# Altium PCB 175-00060, rev1, PCB, NRES RTD_TEC Board.PcbDoc (part 3 of 3)
Units mm, origin at the board's own origin, x right, y up, seen from the top; angles counter-clockwise.
Board outline 188.3 x 85 mm, 7 copper layers (Top Layer (*.GTL), MidLayer1 (*.G1), InternalPlane1 (*.GP1), InternalPlane2 (*.GP2), InternalPlane3 (*.GP3), InternalPlane4 (*.GP4), Bottom Layer (*.GBL)); 241 components, 178 nets, 958 pads, 584 vias.
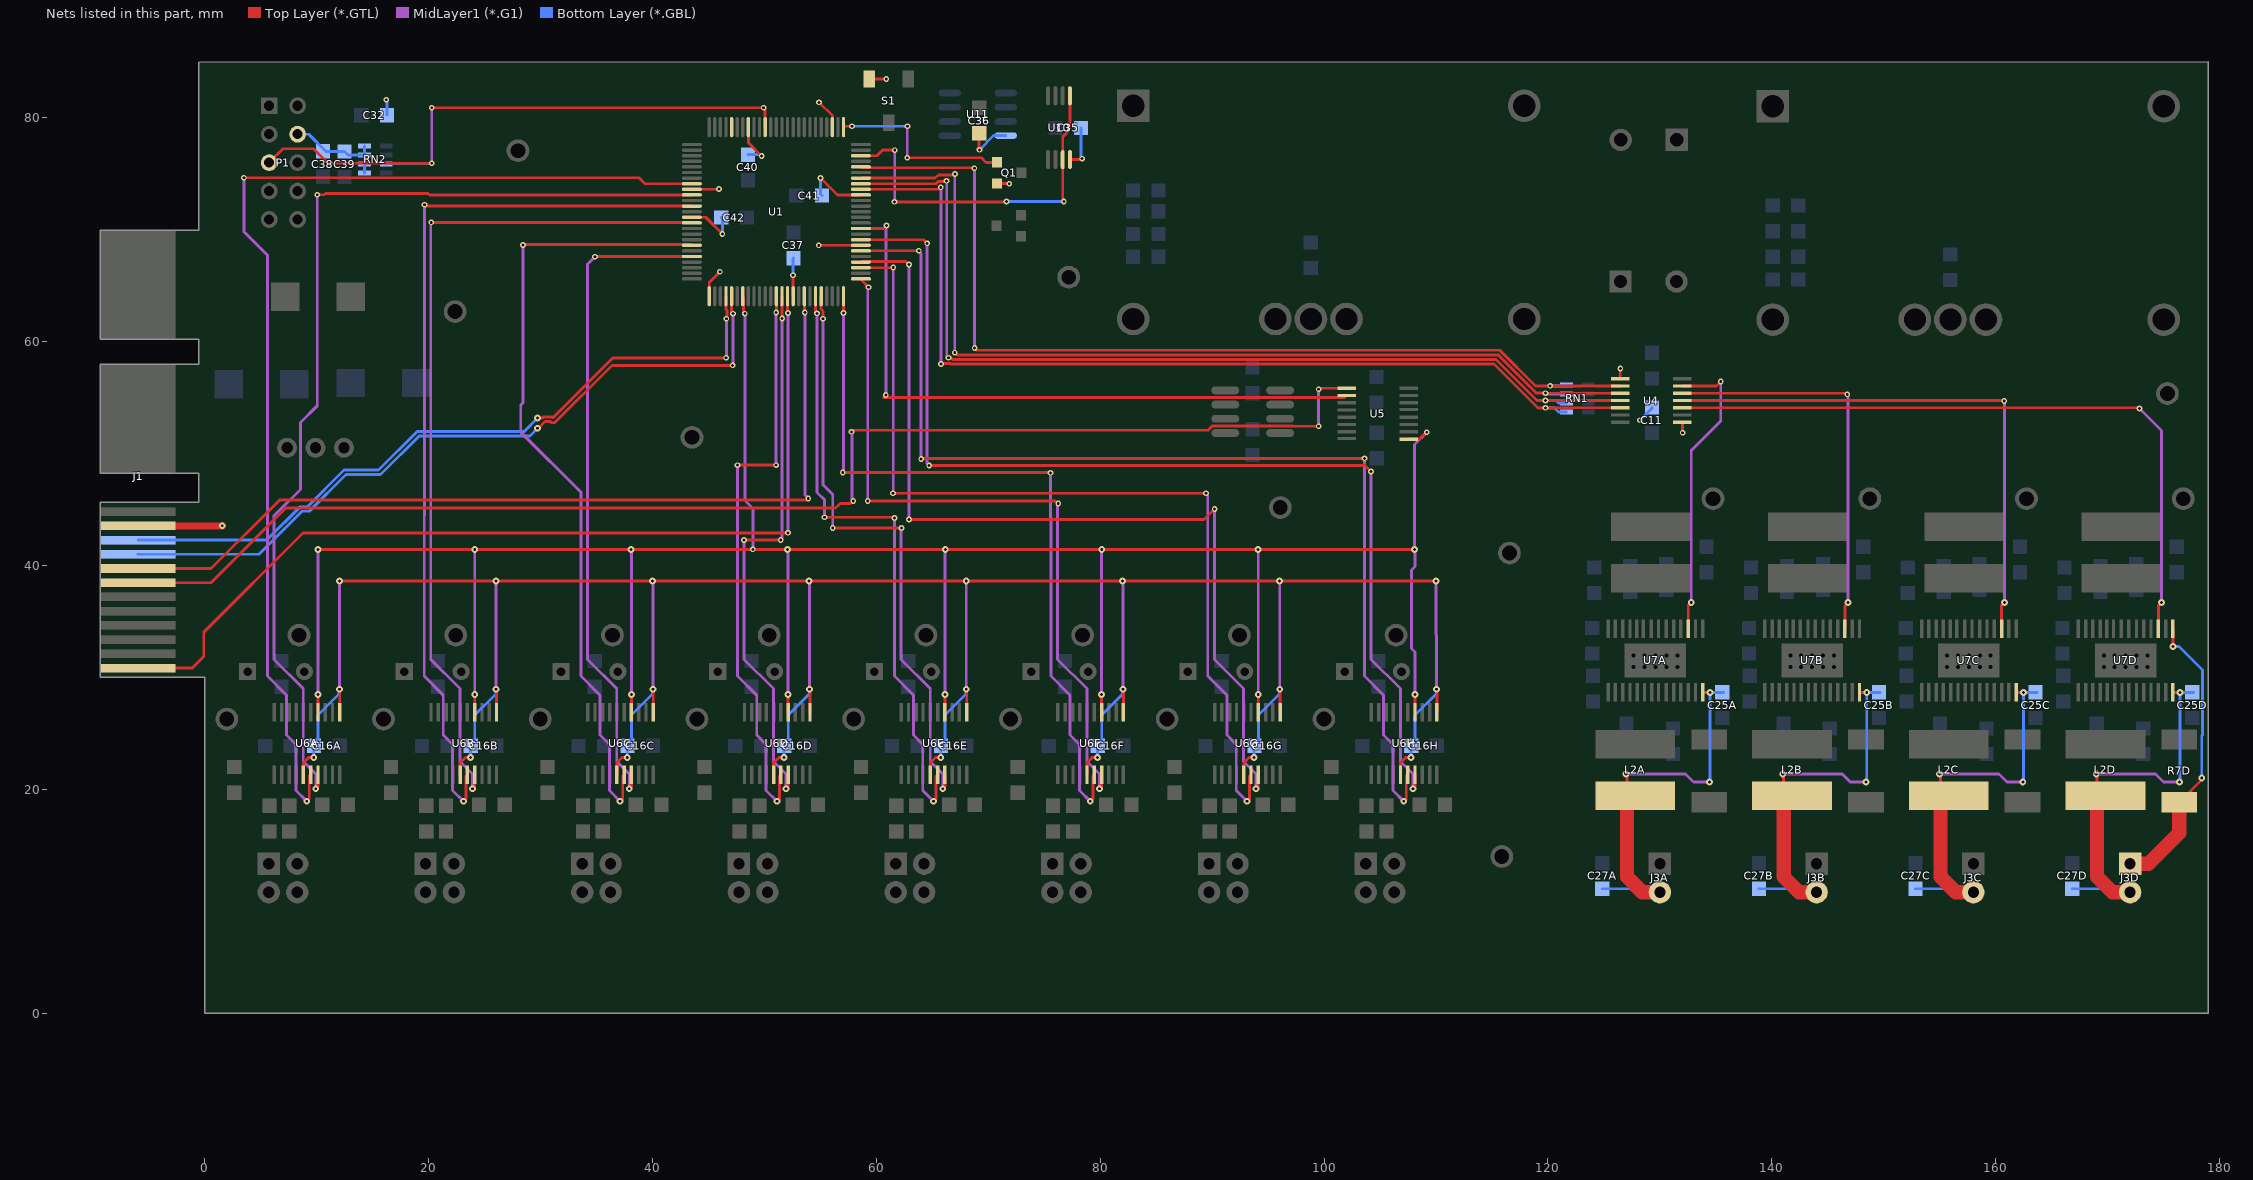
[diagram p8: the nets of this part, all layers, seen from the top]

## Via types
v1: diameter 0.61, hole 0.254, Top Layer (*.GTL) to Bottom Layer (*.GBL), tented both sides, 359 vias
v2: diameter 0.508, hole 0.254, Top Layer (*.GTL) to Bottom Layer (*.GBL), tented both sides, 105 vias
v3: diameter 0.508, hole 0.254, Top Layer (*.GTL) to Bottom Layer (*.GBL), 103 vias
v4: diameter 1.27, hole 0.711, Top Layer (*.GTL) to Bottom Layer (*.GBL), 17 vias

## Nets (pads, with @x,y where several pads share a name; then routed paths per layer and width w, separated by ;. In a path a pad name is that pad's centre, name@x,y a point inside that pad or via, vN(x,y) a via of type N, cw(c..) or ccw(c..) an arc to the next point about the centre after c; other vN are vias at no path point) (continued)
TEC_DRIVE(+)D: J3D.1 R7D.1 U7D.15 | length 26.3
  Top Layer (*.GTL) w0.254: U7D.15@175.825,34.348 175.825,32.756 v1(175.835,32.746) ; R7D.1@176.4,18.84 178.553,20.993 178.536,21.011 v1(178.401,21.011)
  Top Layer (*.GTL) w1.27: J3D.1@172,13.34 173.651,13.34 176.4,16.089 R7D.1@176.4,18.84
  Bottom Layer (*.GBL) w0.254: v1(175.835,32.746) 176.369,32.746 178.477,30.637 178.477,24.821 178.401,24.745 v1(178.401,21.011)
TEC_DRIVE(-)A: C25A.1 C27A.2 J3A.2 L2A.2 U7A.14 | length 36.7
  Top Layer (*.GTL) w0.254: v1(126.977,21.366) 127.054,21.29 L2A.2@127.054,18.682 ; U7A.14@133.825,28.648 134.453,28.648 v1(134.47,28.631)
  Top Layer (*.GTL) w1.27: L2A.2@127.8,19.429 127.054,18.682 127.054,12.172 128.425,10.8 J3A.2@130,10.8
  MidLayer1 (*.G1) w0.254: v1(126.977,21.366) 132.286,21.366 132.997,20.655 v1(134.42,20.655)
  Bottom Layer (*.GBL) w0.254: C27A.2@124.844,11.105 129.695,11.105 J3A.2@130,10.8 ; v1(134.42,20.655) 134.47,20.706 v1(134.47,28.631) 135.664,28.631 C25A.1@135.69,28.656
TEC_DRIVE(-)B: C25B.1 C27B.2 J3B.2 L2B.2 U7B.14 | length 36.7
  Top Layer (*.GTL) w0.254: v1(140.977,21.366) 141.054,21.29 L2B.2@141.054,18.682 ; U7B.14@147.825,28.648 148.453,28.648 v1(148.47,28.631)
  Top Layer (*.GTL) w1.27: L2B.2@141.8,19.429 141.054,18.682 141.054,12.172 142.425,10.8 J3B.2@144,10.8
  MidLayer1 (*.G1) w0.254: v1(140.977,21.366) 146.286,21.366 146.997,20.655 v1(148.42,20.655)
  Bottom Layer (*.GBL) w0.254: C27B.2@138.844,11.105 143.695,11.105 J3B.2@144,10.8 ; v1(148.42,20.655) 148.47,20.706 v1(148.47,28.631) C25B.1@149.664,28.631
TEC_DRIVE(-)C: C25C.1 C27C.2 J3C.2 L2C.2 U7C.14 | length 36.7
  Top Layer (*.GTL) w0.254: v1(154.977,21.366) 155.054,21.29 L2C.2@155.054,18.682 ; U7C.14@161.825,28.648 162.453,28.648 v1(162.47,28.631)
  Top Layer (*.GTL) w1.27: L2C.2@155.8,19.429 155.054,18.682 155.054,12.172 156.425,10.8 J3C.2@158,10.8
  MidLayer1 (*.G1) w0.254: v1(154.977,21.366) 160.286,21.366 160.997,20.655 v1(162.42,20.655)
  Bottom Layer (*.GBL) w0.254: C27C.2@152.844,11.105 157.695,11.105 J3C.2@158,10.8 ; v1(162.42,20.655) 162.47,20.706 v1(162.47,28.631) 163.664,28.631 C25C.1@163.69,28.656
TEC_DRIVE(-)D: C25D.1 C27D.2 J3D.2 L2D.2 U7D.14 | length 36.7
  Top Layer (*.GTL) w0.254: v1(168.977,21.366) 169.054,21.29 L2D.2@169.054,18.682 ; U7D.14@175.825,28.648 176.453,28.648 v1(176.47,28.631)
  Top Layer (*.GTL) w1.27: L2D.2@169.8,19.429 169.054,18.682 169.054,12.172 170.425,10.8 J3D.2@172,10.8
  MidLayer1 (*.G1) w0.254: v1(168.977,21.366) 174.286,21.366 174.997,20.655 v1(176.42,20.655)
  Bottom Layer (*.GBL) w0.254: C27D.2@166.844,11.105 171.695,11.105 J3D.2@172,10.8 ; v1(176.42,20.655) 176.47,20.706 v1(176.47,28.631) 177.664,28.631 C25D.1@177.69,28.656
TMS: P1.5 RN2.5 U1.15 | length 56.1
  Top Layer (*.GTL) w0.254: P1.5@5.766,75.971 7.01,77.216 9.728,77.216 11.024,75.921 v3(20.295,75.921) ; v3(20.295,80.874) v3(49.936,80.874) 50.073,80.737 U1.15@50.073,79.138
  MidLayer1 (*.G1) w0.254: v3(20.295,75.921) v3(20.295,80.874)
  Bottom Layer (*.GBL) w0.254: RN2.5@16.225,75.857 16.288,75.921 v3(20.295,75.921)
VCC: C11.1 C16A.2 C16B.2 C16C.2 C16D.2 C16E.2 C16F.2 C16G.2 C16H.2 C32.2 C35.1 C36.1 C37.2 C38.2 C39.2 C40.2 C41.2 C42.2 J1.S23 P1.4 Q1.2 RN2.2 RN2.4 RN2.6 RN2.8 S1.3 U1.3 U1.18 U1.34 U1.39 U1.51 U1.66 U1.82 U1.91 U4.1 U4.8 U6A.1 U6A.15 U6B.1 U6B.15 U6C.1 U6C.15 U6D.1 U6D.15 U6E.1 U6E.15 U6F.1 U6F.15 U6G.1 U6G.15 U6H.1 U6H.15 U10.8 U11.8 | length 328.2
  Top Layer (*.GTL) w0.254: U6A.15@8.824,21.311 8.824,22.362 9.296,22.835 v1(9.754,22.835) ; v1(12.04,28.931) 12.074,28.896 U6A.1@12.074,26.861 ; v1(12.04,38.608) v1(26.035,38.608) v1(40.005,38.608) v1(53.989,38.608) v1(68.04,38.608) v1(81.989,38.608) v1(96.012,38.608) v1(109.989,38.608) ; U6B.15@22.824,21.311 22.824,22.362 23.296,22.835 v1(23.754,22.835) ; v1(26.04,28.931) 26.074,28.896 U6B.1@26.074,26.861 ; U6C.15@36.824,21.311 36.824,22.362 37.296,22.835 v1(37.754,22.835) ; v1(40.04,28.931) 40.074,28.896 U6C.1@40.074,26.861 ; U1.39@43.523,71.088 44.761,71.088 v3(46.253,69.596) ; U1.34@43.523,73.588 45.927,73.588 v3(45.949,73.609) ; U1.51@45.073,64.038 45.073,65.266 v3(46.025,66.218) ; U1.18@48.573,79.138 48.573,77.741 v3(49.759,76.556) ; U6D.15@50.824,21.311 50.824,22.362 51.296,22.835 v1(51.754,22.835) ; v3(52.553,65.913) 52.573,65.892 U1.66@52.573,64.038 ; v1(54.04,28.931) 54.074,28.896 U6D.1@54.074,26.861 ; v3(54.864,68.58) 54.872,68.588 U1.82@58.623,68.588 ; v3(54.889,81.356) 56.073,80.172 U1.3@56.073,79.138 ; v3(55.016,74.6) 56.528,73.088 U1.91@58.623,73.088 ; S1.3@59.362,83.433 60.878,83.433 v3(60.884,83.439) ; U6E.15@64.824,21.311 64.824,22.362 65.296,22.835 v1(65.754,22.835) ; v1(68.04,28.931) 68.074,28.896 U6E.1@68.074,26.861 ; C36.1@69.19,78.588 69.19,77.14 v3(69.215,77.114) ; Q1.2@70.79,74.117 71.857,74.117 v3(71.882,74.092) ; U10.8@77.302,76.246 78.303,76.246 v3(78.384,76.327) ; U6F.15@78.824,21.311 78.824,22.362 79.296,22.835 v1(79.754,22.835) ; v1(82.04,28.931) 82.074,28.896 U6F.1@82.074,26.861 ; U6G.15@92.824,21.311 92.824,22.362 93.296,22.835 v1(93.754,22.835) ; v1(96.04,28.931) 96.074,28.896 U6G.1@96.074,26.861 ; U6H.15@106.824,21.311 106.824,22.362 107.296,22.835 v1(107.754,22.835) ; v1(110.04,28.931) 110.074,28.896 U6H.1@110.074,26.861 ; U4.1@126.454,56.672 126.454,57.569 v3(126.467,57.582) ; U4.8@132.004,52.772 132.004,51.867 v3(132.029,51.841)
  Top Layer (*.GTL) w0.635: J1.S23@-5.95,43.525 1.565,43.525 v1(1.575,43.536)
  MidLayer1 (*.G1) w0.254: v1(12.04,28.931) v1(12.04,38.608) ; v1(26.04,28.931) v1@26.04,38.608 ; v1(40.04,28.931) v1@40.04,38.608 ; v1(54.04,28.931) v1@54.04,38.608 ; v1(68.04,28.931) v1(68.04,38.608) ; v1(82.04,28.931) v1@82.04,38.608 ; v1(96.04,28.931) v1@96.04,38.608 ; v1(109.989,38.608) v1(110.04,28.931)
  Bottom Layer (*.GBL) w0.254: P1.4@8.306,78.511 9.296,78.511 10.846,76.962 C39.2@12.497,76.962 12.802,76.657 RN2.4@14.275,76.657 ; v1(9.754,22.835) 9.754,23.851 C16A.2@9.779,23.876 10.135,24.232 10.135,26.619 12.014,28.499 12.014,28.905 v1(12.04,28.931) ; RN2.8@14.275,75.057 RN2.6@14.275,75.857 RN2.4@14.275,76.657 ; RN2.2@14.275,77.457 RN2.4@14.275,76.657 ; v3(16.231,81.585) 16.281,81.534 C32.2@16.281,80.213 ; v1(23.754,22.835) 23.754,23.851 C16B.2@23.779,23.876 24.135,24.232 24.135,26.619 26.014,28.499 26.014,28.905 v1(26.04,28.931) ; v1(37.754,22.835) 37.754,23.851 C16C.2@37.779,23.876 38.135,24.232 38.135,26.619 40.014,28.499 40.014,28.905 v1(40.04,28.931) ; C42.2@46.152,71.069 46.253,70.968 v3(46.253,69.596) ; C40.2@48.539,76.683 49.632,76.683 v3(49.759,76.556) ; v1(51.754,22.835) 51.754,23.851 C16D.2@51.779,23.876 52.135,24.232 52.135,26.619 54.014,28.499 54.014,28.905 v1(54.04,28.931) ; v3(52.553,65.913) 52.553,67.386 C37.2@52.603,67.437 ; v3(55.016,74.6) 55.016,73.152 C41.2@55.143,73.025 ; v1(65.754,22.835) 65.754,23.851 C16E.2@65.779,23.876 66.135,24.232 66.135,26.619 68.014,28.499 68.014,28.905 v1(68.04,28.931) ; v3(69.215,77.114) 70.485,78.384 U11.8@71.563,78.384 ; C35.1@78.283,79.07 78.283,76.429 v3(78.384,76.327) ; v1(79.754,22.835) 79.754,23.851 C16F.2@79.779,23.876 80.135,24.232 80.135,26.619 82.014,28.499 82.014,28.905 v1(82.04,28.931) ; v1(93.754,22.835) 93.754,23.851 C16G.2@93.779,23.876 94.135,24.232 94.135,26.619 96.014,28.499 96.014,28.905 v1(96.04,28.931) ; v1(107.754,22.835) 107.754,23.851 C16H.2@107.779,23.876 108.135,24.232 108.135,26.619 110.014,28.499 110.014,28.905 v1(110.04,28.931) ; v3(128.219,52.959) 129.286,54.026 C11.1@129.286,54.102
WSTRB: J1.S13 U1.65 | length 85.5
  Top Layer (*.GTL) w0.254: J1.S13@-5.95,30.825 -1.102,30.825 -0.076,31.852 -0.076,34.026 8.799,42.901 10.566,42.901 51.435,42.901 v2(52.121,42.901) ; U1.65@52.073,64.038 52.073,62.563 52.102,62.535 v2(52.121,62.535)
  MidLayer1 (*.G1) w0.254: v2(52.121,42.901) v2(52.121,62.535)
~CS0: U1.33 U6A.16 | length 100.8
  Top Layer (*.GTL) w0.254: v2(3.505,74.625) 38.811,74.625 39.348,74.088 U1.33@43.523,74.088 ; v1(9.119,18.923) 9.347,19.152 9.347,21.184 U6A.16@9.474,21.311
  MidLayer1 (*.G1) w0.254: v2(3.505,74.625) 3.505,69.799 5.613,67.691 5.613,30.099 7.315,28.397 7.315,24.841 8.153,24.003 8.153,19.888 v1(9.119,18.923)
~CS1: U1.37 U6B.16 | length 81.2
  Top Layer (*.GTL) w0.254: v2(19.634,72.212) 19.758,72.088 U1.37@43.523,72.088 ; v1(23.119,18.923) 23.347,19.152 23.347,21.184 U6B.16@23.474,21.311
  MidLayer1 (*.G1) w0.254: 19.613,44.425 19.613,30.099 21.315,28.397 21.315,24.841 22.153,24.003 22.153,19.888 v1(23.119,18.923) ; 19.634,44.445 v2(19.634,72.212)
~CS2: U1.44 U6C.16 | length 71.1
  Top Layer (*.GTL) w0.254: v2(28.448,68.605) 28.499,68.656 43.455,68.656 U1.44@43.523,68.588 ; v1(37.119,18.923) 37.347,19.152 37.347,21.184 U6C.16@37.474,21.311
  MidLayer1 (*.G1) w0.254: v2(28.448,68.605) 28.448,54.522 28.245,54.319 28.245,51.892 33.613,46.524 ; 33.613,46.507 33.613,30.099 35.315,28.397 35.315,24.841 36.153,24.003 36.153,19.888 v1(37.119,18.923)
~CS3: U1.63 U6D.16 | length 52.6
  Top Layer (*.GTL) w0.254: v2(47.6,48.946) v2(51.054,48.946) ; v2(51.054,62.586) 51.073,62.605 U1.63@51.073,64.038 ; v1(51.119,18.923) 51.347,19.152 51.347,21.184 U6D.16@51.474,21.311
  MidLayer1 (*.G1) w0.254: v2(47.6,48.946) 47.6,44.438 47.613,44.425 47.613,30.099 49.315,28.397 49.315,24.841 50.153,24.003 50.153,19.888 v1(51.119,18.923) ; v2(51.054,48.946) v2(51.054,62.586)
~CS4: U1.70 U6E.16 | length 55.7
  Top Layer (*.GTL) w0.254: U1.70@54.573,64.038 54.573,62.648 v2(54.712,62.509) ; v2(55.372,44.298) 61.468,44.298 61.544,44.221 v2(61.62,44.221) ; v1(65.119,18.923) 65.347,19.152 65.347,21.184 U6E.16@65.474,21.311
  MidLayer1 (*.G1) w0.254: v2(54.712,62.509) 54.712,46.516 55.372,45.855 v2(55.372,44.298) ; v2@61.613,44.247 61.613,30.099 63.315,28.397 63.315,24.841 64.153,24.003 64.153,19.888 v1(65.119,18.923)
~CS5: U1.75 U6F.16 | length 68
  Top Layer (*.GTL) w0.254: v2(56.998,48.285) 75.54,48.285 v2(75.565,48.26) ; v2(57.074,62.535) U1.75@57.073,64.038 ; v1(79.119,18.923) 79.347,19.152 79.347,21.184 U6F.16@79.474,21.311
  MidLayer1 (*.G1) w0.254: v2(56.998,48.285) 57.074,48.362 v2(57.074,62.535) ; v2(75.565,48.26) 75.565,44.041 75.613,43.993 ; 75.613,44.247 75.613,43.993 ; v1(79.119,18.923) 78.153,19.888 78.153,24.003 77.315,24.841 77.315,28.397 75.613,30.099 75.613,43.993
~CS6: U1.78 U6G.16 | length 82.6
  Top Layer (*.GTL) w0.254: U1.78@58.623,66.588 61.508,66.588 v2(61.519,66.599) ; v2(61.493,46.431) v2(89.459,46.431) ; v1(93.119,18.923) 93.347,19.152 93.347,21.184 U6G.16@93.474,21.311
  MidLayer1 (*.G1) w0.254: v2(61.493,46.431) 61.519,46.457 v2(61.519,66.599) ; v2(89.459,46.431) 89.613,46.277 89.613,30.099 91.315,28.397 91.315,24.841 92.153,24.003 92.153,19.888 v1(93.119,18.923)
~CS7: U1.81 U6H.16 | length 98.1
  Top Layer (*.GTL) w0.254: U1.81@58.623,68.088 58.633,68.097 v2(63.805,68.097) ; v2(64.008,49.505) 64.059,49.555 v2(103.607,49.555) ; v1(107.119,18.923) 107.347,19.152 107.347,21.184 U6H.16@107.474,21.311
  MidLayer1 (*.G1) w0.254: v2(63.805,68.097) 63.805,68.047 64.008,67.843 v2(64.008,49.505) ; v2(103.607,49.555) 103.613,49.549 103.613,30.099 105.315,28.397 105.315,24.841 106.153,24.003 106.153,19.888 v1(107.119,18.923)
~CS8: U1.85 U5.2 | length 59.3
  Top Layer (*.GTL) w0.254: U1.85@58.623,70.088 60.639,70.088 v3(60.909,70.358) ; v3(60.858,55.22) 60.635,54.997 101.83,54.997 U5.2@102.006,55.173
  MidLayer1 (*.G1) w0.254: v3(60.858,55.22) 60.858,70.307 v3(60.909,70.358)
~CS9: U1.98 U10.1 U10.7 | length 32.8
  Top Layer (*.GTL) w0.254: U1.98@58.623,76.588 60.078,76.588 60.579,77.089 v3(61.646,77.089) ; v3(61.62,72.466) 71.603,72.466 v3(71.628,72.492) ; v3(76.759,72.492) 76.652,72.598 U10.7@76.652,76.246 76.652,78.278 77.302,78.928 U10.1@77.302,81.946
  MidLayer1 (*.G1) w0.254: v3(61.62,72.466) 61.646,72.492 v3(61.646,77.089)
  Bottom Layer (*.GBL) w0.254: v3(71.628,72.492) v3(76.759,72.492)
~CS10: Q1.1 U1.1 | length 16.8
  Top Layer (*.GTL) w0.254: U1.1@57.073,79.138 57.158,79.223 v3(57.836,79.223) ; v3(62.763,76.403) 69.393,76.403 69.799,75.997 Q1.1@70.79,75.997
  MidLayer1 (*.G1) w0.254: v3(62.763,76.403) 62.763,79.197 v3(62.789,79.223)
  Bottom Layer (*.GBL) w0.254: v3(57.836,79.223) v3(62.789,79.223)
~CS11: U1.21
~DRDY: J1.S9 U1.55 | length 66.5
  Top Layer (*.GTL) w0.254: v1(29.743,52.248) 29.832,52.248 30.416,52.832 30.9,52.832 31.001,52.73 31.245,52.73 36.376,57.861 v2@47.193,57.861 ; U1.55@47.073,64.038 47.073,62.502 47.092,62.484 v2(47.193,62.484)
  MidLayer1 (*.G1) w0.254: v2(47.168,57.861) 47.193,57.887 v2(47.193,62.484)
  Bottom Layer (*.GBL) w0.254: J1.S9@-5.95,40.985 4.858,40.985 8.704,44.831 9.344,44.831 12.621,48.108 15.712,48.108 19.166,51.562 29.058,51.562 v1(29.743,52.248)
~DRDY_0: U1.35 U6A.17 | length 91.1
  Top Layer (*.GTL) w0.254: v1(9.931,20.041) 10.124,20.233 U6A.17@10.124,21.311 ; v2(10.058,73.101) 10.676,73.101 10.803,73.228 19.947,73.228 20.087,73.088 U1.35@43.523,73.088
  MidLayer1 (*.G1) w0.254: v1(9.931,20.041) 9.931,21.361 8.814,22.479 8.814,28.981 6.198,31.598 6.198,44.425 8.56,46.787 8.56,52.756 10.058,54.254 v2(10.058,73.101)
~DRDY_1: U1.40 U6B.17 | length 76.7
  Top Layer (*.GTL) w0.254: v2(20.244,70.637) U1.40@43.474,70.637 ; v1(23.931,20.041) 24.124,20.233 U6B.17@24.124,21.311
  MidLayer1 (*.G1) w0.254: v2(20.244,70.637) 20.198,70.591 20.198,31.598 22.814,28.981 22.814,22.479 23.931,21.361 v1(23.931,20.041)
~DRDY_2: U1.46 U6C.17 | length 59.4
  Top Layer (*.GTL) w0.254: v2(34.874,67.564) 34.898,67.588 U1.46@43.523,67.588 ; v1(37.931,20.041) 38.124,20.233 U6C.17@38.124,21.311
  MidLayer1 (*.G1) w0.254: v2(34.874,67.564) 34.198,66.887 34.198,31.598 36.814,28.981 36.814,22.479 37.931,21.361 v1(37.931,20.041)
~DRDY_3: U1.64 U6D.17 | length 50.2
  Top Layer (*.GTL) w0.254: v2(48.184,42.266) v2(51.46,42.266) ; U1.64@51.573,64.038 51.587,64.024 v2(51.587,62.052) ; v1(51.931,20.041) 52.124,20.233 U6D.17@52.124,21.311
  MidLayer1 (*.G1) w0.254: v2@48.198,42.266 48.198,31.598 50.814,28.981 50.814,22.479 51.931,21.361 v1(51.931,20.041) ; v2(51.46,42.266) 51.587,42.393 v2(51.587,62.052)
~DRDY_4: U1.71 U6E.17 | length 53.5
  Top Layer (*.GTL) w0.254: U1.71@55.073,64.038 55.073,62.902 55.245,62.73 v2(55.245,62.027) ; v2(56.109,43.332) v2(62.255,43.332) ; v1(65.931,20.041) 66.124,20.233 U6E.17@66.124,21.311
  MidLayer1 (*.G1) w0.254: v2(55.245,62.027) 55.245,47.193 56.109,46.33 v2(56.109,43.332) ; v2@62.198,43.332 62.198,31.598 64.814,28.981 64.814,22.479 65.931,21.361 v1(65.931,20.041)
~DRDY_5: U1.76 U6F.17 | length 65.7
  Top Layer (*.GTL) w0.254: U1.76@58.623,65.588 58.623,65.532 v2(59.309,64.846) ; v2(59.233,45.745) 76.022,45.745 v2(76.251,45.517) ; v1(79.931,20.041) 80.124,20.233 U6F.17@80.124,21.311
  MidLayer1 (*.G1) w0.254: v2(59.233,45.745) 59.233,64.77 v2(59.309,64.846) ; v2(76.251,45.517) 76.198,45.464 76.198,31.598 78.814,28.981 78.814,22.479 79.931,21.361 v1(79.931,20.041)
~DRDY_6: U1.79 U6G.17 | length 82.8
  Top Layer (*.GTL) w0.254: U1.79@58.623,67.088 58.667,67.132 62.662,67.132 v2(62.916,66.878) ; v2(62.916,44.094) 89.281,44.094 v2(90.221,45.034) ; v1(93.931,20.041) 94.124,20.233 U6G.17@94.124,21.311
  MidLayer1 (*.G1) w0.254: v2(62.916,44.094) v2(62.916,66.878) ; v2(90.221,45.034) 90.198,45.011 90.198,31.598 92.814,28.981 92.814,22.479 93.931,21.361 v1(93.931,20.041)
~DRDY_7: U1.83 U6H.17 | length 96.9
  Top Layer (*.GTL) w0.254: U1.83@58.623,69.088 64.211,69.088 v2(64.541,68.758) ; v2(64.719,48.92) 103.657,48.92 v2(104.191,48.387) ; v1(107.931,20.041) 108.124,20.233 U6H.17@108.124,21.311
  MidLayer1 (*.G1) w0.254: v2(64.541,68.758) 64.541,49.098 v2(64.719,48.92) ; v2(104.191,48.387) 104.191,44.254 104.198,44.247 104.198,31.598 106.814,28.981 106.814,22.479 107.931,21.361 v1(107.931,20.041)
~LDAC: J1.S19 U5.1 | length 120.9
  Top Layer (*.GTL) w0.254: J1.S19@-5.95,38.445 0.584,38.445 7.249,45.11 56.37,45.11 56.777,45.517 57.709,45.517 v2(57.937,45.745) ; v2(57.785,51.918) 57.937,52.07 89.638,52.07 90.014,52.445 97.235,52.445 97.255,52.426 v2(99.517,52.426) ; v2(99.517,55.728) 99.613,55.823 U5.1@102.006,55.823
  MidLayer1 (*.G1) w0.254: v2(57.785,51.918) 57.836,51.867 57.836,45.847 v2(57.937,45.745) ; v2(99.517,52.426) v2(99.517,55.728)
~LVSHDN_0: RN1.2 U1.96 U4.2 | length 86.9
  Top Layer (*.GTL) w0.254: U1.96@58.623,75.588 58.694,75.517 68.704,75.517 v3(68.758,75.463) ; v3(68.783,59.412) 68.986,59.209 115.696,59.209 118.872,56.032 v3(120.193,56.032) 120.203,56.022 U4.2@126.454,56.022
  MidLayer1 (*.G1) w0.254: v3(68.758,75.463) 68.783,75.438 v3(68.783,59.412)
  Bottom Layer (*.GBL) w0.254: v3@120.269,56.108 v3(120.193,56.032) 121.57,56.032 RN1.2@121.646,56.108
~LVSHDN_1: RN1.4 U1.94 U4.3 | length 87.4
  Top Layer (*.GTL) w0.254: U1.94@58.623,74.588 65.258,74.588 65.549,74.879 66.954,74.879 v3(67.031,74.955) ; v3(67.005,58.996) 67.199,58.802 115.527,58.802 118.947,55.382 v3(119.786,55.382) 119.797,55.372 U4.3@126.454,55.372
  MidLayer1 (*.G1) w0.254: v3(67.005,58.996) 67.005,74.93 v3(67.031,74.955)
  Bottom Layer (*.GBL) w0.254: v3(119.786,55.382) 119.86,55.308 RN1.4@121.646,55.308
~LVSHDN_2: RN1.6 U1.93 U4.4 | length 87.2
  Top Layer (*.GTL) w0.254: U1.93@58.623,74.088 65.333,74.088 65.54,74.295 66.218,74.295 v3(66.269,74.346) ; v3(66.446,58.547) 66.666,58.547 66.816,58.396 115.359,58.396 119.033,54.722 v3(119.786,54.722) U4.4@126.454,54.722
  MidLayer1 (*.G1) w0.254: v3(66.269,74.346) 66.294,74.32 66.294,58.623 66.37,58.547 v3(66.446,58.547)
  Bottom Layer (*.GBL) w0.254: v3(119.786,54.722) 120.723,54.722 120.936,54.508 RN1.6@121.646,54.508
~LVSHDN_3: RN1.8 U1.92 U4.5 | length 87.3
  Top Layer (*.GTL) w0.254: U1.92@58.623,73.588 65.587,73.588 v3(65.761,73.762) ; v3(65.786,57.988) 65.811,58.014 66.624,58.014 66.648,57.99 115.19,57.99 119.119,54.062 v3(119.786,54.062) 119.797,54.072 U4.5@126.454,54.072
  MidLayer1 (*.G1) w0.254: v3(65.761,73.762) 65.786,73.736 v3(65.786,57.988)
  Bottom Layer (*.GBL) w0.254: v3(119.786,54.062) 120.583,54.062 120.936,53.708 RN1.8@121.646,53.708
~RESET: U1.57 U5.9 U6A.4 U6B.4 U6C.4 U6D.4 U6E.4 U6F.4 U6G.4 U6H.4 | length 250.3
  Top Layer (*.GTL) w0.254: U6A.4@10.124,26.861 v1(10.124,28.458) ; v1(10.124,41.402) v1(24.13,41.402) v1(38.1,41.402) v1(52.07,41.402) v1(66.167,41.402) v1(80.137,41.402) v1(94.107,41.402) v1(108.077,41.402) ; U6B.4@24.124,26.861 v1(24.124,28.458) ; U6C.4@38.124,26.861 v1(38.124,28.458) ; U1.57@48.073,64.038 48.133,63.978 48.133,62.586 48.235,62.484 v2(48.26,62.484) ; U6D.4@52.124,26.861 v1(52.124,28.458) ; U6E.4@66.124,26.861 v1(66.124,28.458) ; U6F.4@80.124,26.861 v1(80.124,28.458) ; U6G.4@94.124,26.861 v1(94.124,28.458) ; U5.9@107.556,51.273 108.55,51.273 v3(109.169,51.892) ; U6H.4@108.124,26.861 v1(108.124,28.458)
  MidLayer1 (*.G1) w0.254: v1(10.124,28.458) v1(10.124,41.402) ; v1(24.124,28.458) v1@24.124,41.402 ; v1(38.124,28.458) v1@38.124,41.402 ; v2(48.26,62.484) 48.26,45.796 48.971,45.085 v2(48.971,41.427) ; v1(52.124,28.458) v1@52.124,41.402 ; v1(66.124,28.458) v1@66.124,41.402 ; v1(80.124,28.458) v1@80.124,41.402 ; v1(94.124,28.458) v1@94.124,41.402 ; v1(108.077,41.402) 108.077,50.8 v3(109.169,51.892) ; v1(108.124,28.458) 108.124,32.266 107.823,32.567 107.823,39.579 108.124,39.881 v1@108.124,41.402
~RESET_FPGA: J1.S20 U1.68 | length 80.7
  Top Layer (*.GTL) w0.254: J1.S20@-5.95,39.715 0.584,39.715 6.716,45.847 53.797,45.847 v2(53.924,45.974) ; U1.68@53.573,64.038 53.573,62.59 53.578,62.586 v2(53.619,62.586)
  MidLayer1 (*.G1) w0.254: v2(53.619,62.586) 53.619,46.279 v2(53.924,45.974)
~SHDN: J1.S10 U1.54 | length 64.9
  Top Layer (*.GTL) w0.254: v1(29.743,53.162) 30.171,53.162 30.247,53.238 31.068,53.238 31.123,53.183 36.461,58.522 v2@46.584,58.522 ; U1.54@46.573,64.038 46.573,62.868 46.66,62.781 46.66,62.078 v2(46.609,62.027)
  MidLayer1 (*.G1) w0.254: v2(46.584,58.547) 46.609,58.572 v2(46.609,62.027)
  Bottom Layer (*.GBL) w0.254: J1.S10@-5.95,42.255 5.554,42.255 8.536,45.237 9.176,45.237 12.452,48.514 15.543,48.514 18.998,51.968 28.55,51.968 v1(29.743,53.162)
~SHDN_0: U4.13 U7A.17 | length 26.9
  Top Layer (*.GTL) w0.254: U4.13@132.004,56.022 135.041,56.022 v3(135.433,56.413) ; U7A.17@132.525,34.348 132.525,36.414 v1(132.794,36.683)
  MidLayer1 (*.G1) w0.254: v1(132.794,36.683) 132.794,50.244 135.433,52.883 v3(135.433,56.413)
~SHDN_1: U4.12 U7B.17 | length 35.8
  Top Layer (*.GTL) w0.254: U4.12@132.004,55.372 146.634,55.372 v3(146.736,55.27) ; U7B.17@146.525,34.348 146.525,36.414 v1(146.794,36.683)
  MidLayer1 (*.G1) w0.254: v3(146.736,55.27) 146.794,55.212 v1(146.794,36.683)
~SHDN_2: U4.11 U7C.17 | length 49.2
  Top Layer (*.GTL) w0.254: U4.11@132.004,54.722 160.721,54.722 v3(160.757,54.686) ; U7C.17@160.525,34.348 160.525,36.414 v1(160.794,36.683)
  MidLayer1 (*.G1) w0.254: v3(160.757,54.686) 160.794,54.649 v1(160.794,36.683)
~SHDN_3: U4.10 U7D.17 | length 61.4
  Top Layer (*.GTL) w0.254: U4.10@132.004,54.072 172.775,54.072 v3(172.847,54) ; U7D.17@174.525,34.348 174.525,36.414 v1(174.794,36.683)
  MidLayer1 (*.G1) w0.254: v3(172.847,54) 174.794,52.053 v1(174.794,36.683)
pads on no net: J1.S15 J1.S16 P1.6 P1.7 P1.8 U1.2 U1.6 U1.7 U1.8 U1.9 U1.10 U1.12 U1.13 U1.14 U1.16 U1.17 U1.19 U1.20 U1.22 U1.23 U1.24 U1.25 U1.27 U1.28 U1.29 U1.30 U1.31 U1.32 U1.87 U1.88 U1.89 U1.90 U1.97 U1.99 U1.100 U2.3 U2.5 U3.3 U3.5 U4.6 U4.9 U5.6 U5.7 U5.10 U5.11 U6A.10 U6B.10 U6C.10 U6D.10 U6E.10 U6F.10 U6G.10 U6H.10 U7A.13 U7B.13 U7C.13 U7D.13 U8.1 U8.5 U8.7 U8.8
copper on no net: | length 7.1
  Bottom Layer (*.GBL) w0.254: 73.203,3.302 ccw(c72.068,3.302) 73.203,3.302

## Polygon pours and split planes (outlines as drawn)
A on InternalPlane1 (*.GP1) (split plane): 0,57.728 118.728,57.728 118.728,0.51 0.51,0.51 0.51,30 0.501,30.1 0.472,30.195 0.424,30.284 0.361,30.361 0.284,30.424 0.195,30.472 0.1,30.501 0,30.51 -8.793,30.51 -8.793,45.111 -0.54,45.111 -0.44,45.12 -0.345,45.149 -0.256,45.197 -0.179,45.26 -0.116,45.337 -0.068,45.426 -0.039,45.521 -0.03,45.621 -0.03,48.212 -0.039,48.311 -0.068,48.407 -0.116,48.495 -0.179,48.573 -0.256,48.636 -0.345,48.683 -0.44,48.712 -0.54,48.722 -8.793,48.722 -8.793,57.43 -0.54,57.43 -0.44,57.439 -0.345,57.468 -0.256,57.516 -0.179,57.579 -0.116,57.656 -0.075,57.732
T on InternalPlane1 (*.GP1) (split plane): 178.49,0.51 121.272,0.51 121.272,59 121.264,59.142 121.24,59.283 121.201,59.42 121.146,59.552 121.077,59.677 120.994,59.793 120.899,59.899 120.793,59.994 120.677,60.077 120.552,60.146 120.42,60.201 120.283,60.24 120.142,60.264 120,60.272 0,60.272 -0.036,60.27 -0.039,60.3 -0.068,60.396 -0.116,60.484 -0.179,60.562 -0.256,60.625 -0.345,60.672 -0.44,60.701 -0.54,60.711 -8.793,60.711 -8.793,69.418 -0.54,69.418 -0.44,69.428 -0.345,69.457 -0.256,69.504 -0.179,69.568 -0.116,69.645 -0.068,69.733 -0.039,69.829 -0.03,69.929 -0.03,84.419 178.49,84.489
+5VTEC1 on InternalPlane2 (*.GP2) (split plane): 135.744,52.002 135.744,51.998 135.744,51.994 135.748,51.965 135.752,51.935 135.754,51.932 135.754,51.928 135.766,51.901 135.777,51.873 135.78,51.87 135.781,51.867 135.8,51.844 135.818,51.82 135.821,51.818 135.823,51.815 135.847,51.797 135.87,51.779 135.874,51.778 135.877,51.775 135.905,51.765 135.932,51.753 135.936,51.752 135.939,51.751 135.969,51.748 135.998,51.744 136.002,51.744 136.006,51.744 150.744,52.078 150.744,0.51 121.272,0.51 121.272,59 121.264,59.142 121.24,59.283 121.201,59.42 121.146,59.552 121.077,59.677 120.994,59.793 120.899,59.899 120.793,59.994 120.677,60.077 120.552,60.146 120.42,60.201 120.283,60.24 120.142,60.264 120,60.272 114.006,60.272 114.006,67.384 135.849,67.384
+5VTEC2 on InternalPlane2 (*.GP2) (split plane): 178.49,0.51 151.256,0.51 151.256,52 151.256,75 151.247,75.066 151.222,75.128 151.181,75.181 151.128,75.222 151.066,75.247 151,75.256 129.256,75.256 129.256,81 129.256,84.47 178.49,84.489
+24V on InternalPlane2 (*.GP2) (split plane): 128.744,81 128.744,75 128.753,74.934 128.778,74.872 128.819,74.819 128.872,74.778 128.934,74.753 129,74.744 150.744,74.744 150.744,52.59 136.258,52.262 136.363,67.638 136.363,67.639 136.363,67.64 136.359,67.672 136.355,67.705 136.354,67.706 136.354,67.707 136.342,67.736 136.329,67.767 136.329,67.768 136.309,67.794 136.289,67.82 136.288,67.821 136.262,67.841 136.236,67.861 136.235,67.862 136.205,67.875 136.175,67.887 136.174,67.887 136.173,67.888 136.14,67.892 136.108,67.896 136.107,67.896 113.75,67.896 113.684,67.888 113.622,67.862 113.569,67.821 113.528,67.768 113.503,67.707 113.494,67.64 113.494,60.272 -0.037,60.272 -0.039,60.3 -0.068,60.396 -0.116,60.484 -0.179,60.562 -0.256,60.625 -0.345,60.672 -0.44,60.701 -0.54,60.711 -8.793,60.711 -8.793,69.418 -0.54,69.418 -0.44,69.428 -0.345,69.457 -0.256,69.504 -0.179,69.568 -0.116,69.645 -0.068,69.733 -0.039,69.829 -0.03,69.929 -0.03,84.419 128.744,84.47
+5ANA on InternalPlane2 (*.GP2) (split plane): 114,57.728 118.728,57.728 118.728,0.51 0.51,0.51 0.51,30 0.501,30.1 0.472,30.195 0.424,30.284 0.361,30.361 0.284,30.424 0.195,30.472 0.1,30.501 0,30.51 -8.793,30.51 -8.793,45.111 -0.54,45.111 -0.44,45.12 -0.345,45.149 -0.256,45.197 -0.179,45.26 -0.116,45.337 -0.068,45.426 -0.039,45.521 -0.03,45.621 -0.03,48.212 -0.039,48.311 -0.068,48.407 -0.116,48.495 -0.179,48.573 -0.256,48.636 -0.345,48.683 -0.44,48.712 -0.54,48.722 -8.793,48.722 -8.793,57.43 -0.54,57.43 -0.44,57.439 -0.345,57.468 -0.256,57.516 -0.179,57.579 -0.116,57.656 -0.077,57.728 113.75,57.728 113.875,57.735
D on InternalPlane3 (*.GP3) (split plane): 178.49,0.51 0.51,0.51 0.51,30 0.501,30.1 0.472,30.195 0.424,30.284 0.361,30.361 0.284,30.424 0.195,30.472 0.1,30.501 0,30.51 -8.793,30.51 -8.793,45.111 -0.54,45.111 -0.44,45.12 -0.345,45.149 -0.256,45.197 -0.179,45.26 -0.116,45.337 -0.068,45.426 -0.039,45.521 -0.03,45.621 -0.03,48.212 -0.039,48.311 -0.068,48.407 -0.116,48.495 -0.179,48.573 -0.256,48.636 -0.345,48.683 -0.44,48.712 -0.54,48.722 -8.793,48.722 -8.793,57.43 -0.54,57.43 -0.44,57.439 -0.345,57.468 -0.256,57.516 -0.179,57.579 -0.116,57.656 -0.068,57.745 -0.039,57.84 -0.03,57.94 -0.03,60.201 -0.039,60.3 -0.068,60.396 -0.116,60.484 -0.179,60.562 -0.256,60.625 -0.345,60.672 -0.44,60.701 -0.54,60.711 -8.793,60.711 -8.793,69.418 -0.54,69.418 -0.44,69.428 -0.345,69.457 -0.256,69.504 -0.179,69.568 -0.116,69.645 -0.068,69.733 -0.039,69.829 -0.03,69.929 -0.03,84.419 178.49,84.489
VCC on InternalPlane4 (*.GP4) (split plane): 178.49,0.51 0.51,0.51 0.51,30 0.501,30.1 0.472,30.195 0.424,30.284 0.361,30.361 0.284,30.424 0.195,30.472 0.1,30.501 0,30.51 -8.793,30.51 -8.793,45.111 -0.54,45.111 -0.44,45.12 -0.345,45.149 -0.256,45.197 -0.179,45.26 -0.116,45.337 -0.068,45.426 -0.039,45.521 -0.03,45.621 -0.03,48.212 -0.039,48.311 -0.068,48.407 -0.116,48.495 -0.179,48.573 -0.256,48.636 -0.345,48.683 -0.44,48.712 -0.54,48.722 -8.793,48.722 -8.793,57.43 -0.54,57.43 -0.44,57.439 -0.345,57.468 -0.256,57.516 -0.179,57.579 -0.116,57.656 -0.068,57.745 -0.039,57.84 -0.03,57.94 -0.03,60.201 -0.039,60.3 -0.068,60.396 -0.116,60.484 -0.179,60.562 -0.256,60.625 -0.345,60.672 -0.44,60.701 -0.54,60.711 -8.793,60.711 -8.793,69.418 -0.54,69.418 -0.44,69.428 -0.345,69.457 -0.256,69.504 -0.179,69.568 -0.116,69.645 -0.068,69.733 -0.039,69.829 -0.03,69.929 -0.03,84.419 178.49,84.489

## Other copper
Top Layer (*.GTL):
  text "*.GTL - TOP LAYER GERBER DATA" at 60.865,-39.579 h2.03
MidLayer1 (*.G1):
  text "*.G1 - MID LAYER 1 GERBER DATA" at 60.865,-39.579 h2.03
Bottom Layer (*.GBL):
  text "175-00060 rev1" at 72.974,6.833 h1.02
  text "PCB, NRES, RTD/TEC BOARD" at 72.873,5.029 h1.02
  text "c" at 72.466,2.921 h1.02
  text "2103, LAS CUMBRES OBSERVATORY" at 69.952,2.819 h1.02
  text "*.GBL - BOTTOM LAYER GERBER DATA" at 60.865,-39.579 h2.03
InternalPlane1 (*.GP1) (plane layer: these items are gaps in the copper):
  lines w2.54: 0,59 120,59 120,0.34
  text "*.GP1 - INTERNAL PLANE LAYER 1 GERBER DATA" at 60.865,-39.579 h2.03
InternalPlane2 (*.GP2) (plane layer: these items are gaps in the copper):
  lines w0.508: 113.75,59.25 113.75,67.64 136.107,67.64 136,52 151,52.34 151,0.34 ; 120,0.34 120,52.34 120.66,52.34 ; 129,85 129,81 129,75 151,75 151,52
  lines w2.54: -0.54,59 113.75,59 ; 114,59 120,59 120,0
  text "*.GP2 - INTERNAL PLANE LAYER 2 GERBER DATA" at 60.865,-39.579 h2.03
InternalPlane3 (*.GP3) (plane layer: these items are gaps in the copper):
  text "*.GP3- INTERNAL PLANE LAYER 3 GERBER DATA" at 60.865,-39.579 h2.03
InternalPlane4 (*.GP4) (plane layer: these items are gaps in the copper):
  text "*.GP4 - INTERNAL PLANE LAYER 4 GERBER DATA" at 60.865,-39.579 h2.03

## Silkscreen, mask and mechanical layers (free items; w line width, h text height)
Top Overlay:
  rectangle: 154.153,54.966 159.791,58.217
  lines w0.254: 4.906,47.995 14.906,47.995 ; 8.509,16.18 9.398,15.138 ; 126.492,74.955 126.492,76.733 ; 131.496,75.032 131.496,76.733 ; 124,60 134,60 134,74.905 124,74.905 124,60
  lines w0.5: 0,-5.5 0,-3 179,-3 179,-5.5 0,-5.5
  text "PGM" at 64.821,80.975 h1.02
  text "TCK" at 1.168,80.62 h1.02
  text "TDO" at 1.092,78.08 h1.02
  text "VCC" at 10.262,78.08 h1.02
  text "TMS" at 1.143,75.438 h1.02
  text "+24V" at 25.908,74.168 h1.02
  text "TDI" at 1.27,70.256 h1.02
  text "GND" at 10.109,70.256 h1.02
  text "+5VTEC1" at 73.508,63.068 h1.02
  text "+12V" at 24.028,61.671 h1.02
  text "780-00055 rev:" at 140.208,56.236 h1.02
  text "+5VTEC2" at 166.522,55.753 h1.02
  text "SCH, NRES, RTD/TEC BOARD" at 140.106,53.569 h1.02
  text "AGND" at 42.012,48.235 h1.02
  text "+5ANA" at 95.783,42.469 h1.02
  text "AGND" at 115.291,38.303 h1.02
  text "AGND" at 114.122,11.074 h1.02
  text "FOR REV2: Change soldermask clearance on J2 and J3 to clear copper" at 114.224,-20.193 h2
  text "*.GTO - TOP OVERLAY GERBER DATA" at 60.865,-39.579 h2.03
  text "PCB is 3mm back from backside of front panel" at 167.248,-68.922 h1.02
  text "the 3mm leaves room for back nut and washer" at 167.248,-72.322 h1.02
  text "LEMOs are installed flush to PCB then back nut is screwed on" at 166.248,-75.822 h1.02
  text "LEMO sticks out of front panel 4mm to fit nut + colored washer" at 165.248,-78.822 h1.02
Bottom Overlay:
  lines w0.254: 126.5,66.954 126.5,68.75 ; 131.5,66.75 131.5,68.75 ; 124,68.758 134,68.758 134,84 124,84 124,68.758
  text "*GBO - BOTTOM OVERLAY GERBER DATA" at 60.865,-39.579 h2.03
Top Paste:
  text "*.GTP - TOP-SIDE SOLDER PASTE MASK" at 60.865,-39.579 h2.03
Bottom Paste:
  text "*.GBP - BOTTOM-SIDE SOLDER PASTE MASK" at 60.865,-39.579 h2.03
Top Solder:
  text "*.GTS - TOP SOLDER MASK GERBER DATA" at 60.865,-39.579 h2.03
Bottom Solder:
  rectangle: 40.03,0.584 74.168,8.509
  text "*.GBS - BOTTOM SOLDER MASK GERBER DATA" at 60.865,-39.579 h2.03
Mechanical 1:
  lines w0.5: -0.54,30 0,30 0,0 179,0 179,85 -0.54,84.929 -0.54,69.929
Mechanical 2:
  lines w0.254: -270.402,-247.427 262.998,-247.427 262.998,158.973 -270.402,158.973 -270.402,-247.427 ; 160.001,-244.735 ccw(c161.271,-244.735) 161.271,-246.005 169.653,-246.005 ccw(c169.653,-244.989) 170.669,-244.989 170.669,-240.671 ccw(c169.653,-240.671) 169.653,-239.655 160.001,-239.655 160.001,-244.735 ; 160.001,-237.369 ccw(c161.271,-237.369) 161.271,-238.639 260.331,-238.639 ccw(c260.331,-237.369) 261.601,-237.369 261.601,-232.543 ccw(c260.331,-232.543) 260.331,-231.273 160.001,-231.273 160.001,-237.369 ; 160.001,-228.987 ccw(c161.271,-228.987) 161.271,-230.257 209.023,-230.257 ccw(c209.023,-228.987) 210.293,-228.987 210.293,-225.177 ccw(c209.023,-225.177) 209.023,-223.907 160.001,-223.907 160.001,-228.987 ; 160.001,-221.875 ccw(c161.017,-221.875) 161.017,-222.891 181.591,-222.891 ccw(c181.591,-221.621) 182.861,-221.621 182.861,-217.811 ccw(c181.591,-217.811) 181.591,-216.541 160.001,-216.541 160.001,-221.875 ; 171.685,-244.989 ccw(c172.701,-244.989) 172.701,-246.005 222.485,-246.005 ccw(c222.485,-244.989) 223.501,-244.989 223.501,-240.671 ccw(c222.485,-240.671) 222.485,-239.655 171.685,-239.655 171.685,-244.989 ; 183.877,-221.621 ccw(c185.147,-221.621) 185.147,-222.891 209.023,-222.891 ccw(c209.023,-221.621) 210.293,-221.621 210.293,-217.811 ccw(c209.023,-217.811) 209.023,-216.541 183.877,-216.541 183.877,-221.621 ; 211.309,-228.987 ccw(c212.579,-228.987) 212.579,-230.257 260.331,-230.257 ccw(c260.331,-228.987) 261.601,-228.987 261.601,-225.177 ccw(c260.331,-225.177) 260.331,-223.907 211.309,-223.907 211.309,-228.987 ; 211.309,-221.621 ccw(c212.579,-221.621) 212.579,-222.891 236.455,-222.891 ccw(c236.455,-221.621) 237.725,-221.621 237.725,-217.811 ccw(c236.455,-217.811) 236.455,-216.541 211.309,-216.541 211.309,-221.621 ; 224.517,-244.735 ccw(c225.787,-244.735) 225.787,-246.005 234.169,-246.005 ccw(c234.169,-244.989) 235.185,-244.989 235.185,-240.671 ccw(c234.169,-240.671) 234.169,-239.655 224.517,-239.655 224.517,-244.735 ; 236.201,-244.989 ccw(c237.217,-244.989) 237.217,-246.005 260.331,-246.005 ccw(c260.331,-244.735) 261.601,-244.735 261.601,-240.925 ccw(c260.331,-240.925) 260.331,-239.655 236.201,-239.655 236.201,-244.989 ; 238.741,-221.621 ccw(c240.011,-221.621) 240.011,-222.891 260.331,-222.891 ccw(c260.331,-221.621) 261.601,-221.621 261.601,-217.811 ccw(c260.331,-217.811) 260.331,-216.541 238.741,-216.541 238.741,-221.621
  lines w0.483: -237.622,-143.938 -86.254,-143.938 ; -237.622,-135.228 -86.254,-135.228 ; -239.166,-216.687 ccw(c-236.347,-216.687) -236.347,-219.507 -87.528,-219.507 ccw(c-87.528,-216.687) -84.709,-216.687 -84.709,-125.476 ccw(c-87.528,-125.476) -87.528,-122.657 -236.347,-122.657 ccw(c-236.347,-125.476) -239.166,-125.476 -239.166,-216.687
  lines w0.508: -269.892,-231.022 cw(c-268.624,-232.924) -268.624,-230.638 ; -268.624,-231.654 ccw(c-268.624,-232.924) -269.894,-232.924 -269.894,-245.37 ccw(c-268.624,-245.37) -268.624,-246.64 -187.344,-246.64 ccw(c-187.344,-245.37) -186.074,-245.37 -186.074,-236.734 ccw(c-187.344,-236.734) -187.344,-235.464 -254.4,-235.464 ; -185.442,-246.638 ccw(c-187.344,-245.37) -185.058,-245.37 -185.058,-236.734 ; 158.888,-247.02 cw(c161.271,-244.735) 157.969,-244.735 157.969,-202.317 cw(c161.271,-202.317) 161.271,-199.015 260.331,-199.015 cw(c260.331,-202.317) 262.583,-199.902 ; -79.14,-242.855 ccw(c-75.838,-242.855) -75.838,-246.157 44.558,-246.157 ccw(c44.558,-242.855) 47.86,-242.855 47.86,-202.469 ccw(c44.558,-202.469) 44.558,-199.167 -75.838,-199.167 ccw(c-75.838,-202.469) -79.14,-202.469 -79.14,-242.855 ; 158.985,-244.735 ccw(c161.271,-244.735) 161.271,-247.021 260.331,-247.021 ccw(c260.331,-244.735) 262.617,-244.735 262.617,-202.317 ccw(c260.331,-202.317) 260.331,-200.031 161.271,-200.031 ccw(c161.271,-202.317) 158.985,-202.317 158.985,-244.735
  lines w0.61: -14.37,-242.093 -10.56,-242.093 ; -14.37,-235.743 -10.56,-235.743 ; -14.37,-229.393 -10.56,-229.393 ; -14.37,-223.043 -10.56,-223.043 ; -14.37,-216.693 -10.56,-216.693
  lines w0.762: -283.102,-260.127 275.698,-260.127 275.698,171.673 -283.102,171.673 -283.102,-260.127
  lines w1.27: 163.684,-212.756 205.594,-212.756 ; 163.684,-203.104 205.594,-203.104 ; 205.594,-212.756 163.43,-212.756 163.43,-203.104 205.594,-203.104 ; 205.594,-212.756 205.594,-203.104
  text "NOTES (UNLESS OTHERWISE SPECIFIED):" at -262.274,145.663 h2.29
  text "GENERAL" at -259.734,140.583 h2.29
  text "1)" at -257.194,135.502 h1.91
  text "PCB IS 7-LAYER, .062\" THICK." at -252.114,135.503 h1.91
  text "2)" at -257.194,131.692 h1.91
  text "CONSTRUCTION IS SOLDER-MASK-OVER-BARE-COPPER (SMOBC)." at -252.114,131.692 h1.91
  text "3)" at -257.194,127.882 h1.91
  text "ACCEPTABILITY SHALL BE BASED ON IPC-A-600, CLASS 2." at -252.114,127.882 h1.91
  text "4)" at -257.194,124.072 h1.91
  text "THE FOLLOWING GERBER RS274X PHOTO TOOL FILES SHALL BE USED TO DEFINE ALL CIRCUIT FEATURES:" at -252.114,124.072 h1.91
  text "*.GTL - TOP LAYER GERBER DATA" at -245.154,118.714 h2.03
  text "*.G1 - MID LAYER 1 GERBER DATA" at -245.154,114.811 h2.03
  text "*.GP1 - INTERNAL PLANE LAYER 1 GERBER DATA" at -245.154,103.102 h2.03
  text "*.GP2 - INTERNAL PLANE LAYER 2 GERBER DATA" at -245.154,99.198 h2.03
  text "*.GP3- INTERNAL PLANE LAYER 3 GERBER DATA" at -245.154,95.295 h2.03
  text "*.GP4 - INTERNAL PLANE LAYER 4 GERBER DATA" at -245.154,91.392 h2.03
  text "*.GBL - BOTTOM LAYER GERBER DATA" at -245.154,83.586 h2.03
  text "*.GTO - TOP OVERLAY GERBER DATA" at -245.154,79.683 h2.03
  text "*.GTS - TOP SOLDER MASK GERBER DATA" at -245.154,75.78 h2.03
  text "PLATING AND CHAMFERING" at -79,72 h1.52
  text "*.GTP - TOP-SIDE SOLDER PASTE MASK" at -245.154,71.876 h2.03
  text "SEE .PDF FILE: SD-46114-400.PDF" at -79,68 h1.52
  text "*GBO - BOTTOM OVERLAY GERBER DATA" at -245.154,67.973 h2.03
  text "INCLUDED IN DRAWING PACKAGE" at -79,65 h1.52
  text "*.GBS - BOTTOM SOLDER MASK GERBER DATA" at -245.154,64.07 h2.03
  text "*.GBP - BOTTOM-SIDE SOLDER PASTE MASK" at -245.154,60.167 h2.03
  text "5)" at -259.657,41.987 h1.91
  text "THE PHOTO TOOL SHALL NOT BE COMPENSATED WITHOUT PRIOR ENGINEERING APPROVAL." at -254.577,41.987 h1.91
  text "PCB DESIGNER: RICH LOBDILL   PH (805) 880-1621  FAX (805) 961-1792." at -254.577,38.178 h1.91
  text "FABRICATION TOLERANCES" at -258.26,29.89 h2.29
  text "6)" at -255.72,24.809 h1.91
  text "END PRODUCT CONDUCTOR WIDTHS AND PAD DIAMETERS SHALL NOT VARY MORE THAN" at -250.64,24.809 h1.91
  text "0.002\" FROM THE 1:1 DIMENSIONS OF THE MASTER ARTWORK." at -250.64,21 h1.91
  text "7)" at -255.72,17.189 h1.91
  text "THE CONDUCTIVE PATTERN SHALL BE POSITIONED SO THAT THE LOCATION OF ANY PAD OR" at -250.64,17.189 h1.91
  text "LAND SHALL BE WITHIN 0.005\" DIAMETER TO THE TRUE POSITION OF THE HOLE IT CIRCUMSCRIBES." at -250.64,13.38 h1.91
  text "8)" at -255.72,9.569 h1.91
  text "ALL DRILL HOLE SIZES AND TOLERANCES APPLY AFTER PLATING." at -250.64,9.569 h1.91
  text "9)" at -255.72,5.759 h1.91
  text "THE MINIMUM ANNULAR RING SHALL BE 0.005\"." at -250.64,5.759 h1.91
  text "10)" at -257.117,1.949 h1.91
  text "BOW AND TWIST SHALL NOT EXCEED 0.010\" PER INCH." at -250.64,1.949 h1.91
  text "11)" at -256.863,-1.861 h1.91
  text "FOR PCB ROUTING DIMENSIONS: .XXX = +/-.005\"  .XX = +/-.020\"" at -250.64,-1.861 h1.91
  text "MATERIAL" at -258.26,-6.94 h2.29
  text "12)" at -257.117,-12.021 h1.91
  text "BASE MATERIAL IS FR4 EPOXY FIBERGLASS" at -250.463,-12.172 h1.91
  text "SEE STACK-UP LEGEND FOR COPPER CLADDING CALL OUTS" at -250.463,-15.728 h1.91
  text "13)" at -257.117,-15.831 h1.91
  text "PLATING" at -258.26,-20.91 h2.29
  text "14)" at -257.117,-25.864 h1.91
  text "ALL HOLES AND CONDUCTIVE SURFACES SHALL BE PLATED WITH A MINIMUM OF 0.001\" COPPER." at -250.64,-25.864 h1.91
  text "15)" at -257.117,-29.674 h1.91
  text "AFTER SOLDERMASK, ALL EXPOSED HOLES AND CONDUCTIVE SURFACES SHALL BE COATED" at -250.64,-29.674 h1.91
  text "WITH A GOLD IMMERSION PLATING TO PRESERVE SOLDERABILITY." at -250.463,-33.508 h1.91
  text "16)" at -256.457,-38.131 h1.91
  text "COPPER THEVING ON LAYERS AS NEEDED" at -250.386,-38.183 h1.91
  text "COATINGS" at -258.26,-46.056 h2.29
  text "THE SOLDERMASK SHALL BE RED LIQUID PHOTO-IMAGEABLE PER IPC-SM-840, TYPE-B, CLASS 2." at -250.64,-51.01 h1.91
  text "17)" at -256.838,-51.085 h1.91
  text "THE SOLDERMASK REGISTRATION ALLOWANCE IS 0.003\".  THERE SHALL BE NO SOLDERMASK ON" at -250.64,-54.82 h1.91
  text "18)" at -257.092,-55.53 h1.91
  text "ANY SOLDER PAD OR LAND." at -250.64,-58.63 h1.91
  text "MARKING" at -258.26,-63.709 h2.29
  text "THE LEGEND SHALL BE SCREEN-PRINTED USING PERMANENT YELLOW EPOXY INK." at -250.64,-68.663 h1.91
  text "19)" at -257.219,-68.738 h1.91
  text "THE SCREEN PRINTING REGISTRATION ALLOWANCE IS 0.007\".  THERE SHALL BE NO INK ON ANY" at -250.64,-72.473 h1.91
  text "20)" at -257.219,-72.929 h1.91
  text "SOLDER PAD OR LAND." at -250.64,-76.282 h1.91
  text "21)" at -257.117,-79.712 h1.91
  text "THE VENDOR CODE AND UL FLAMMABILITY RATING MAY BE ETCHED IN THE FOIL OR MARKED IN" at -250.64,-80.093 h1.91
  text "PERMANENT EPOXY INK (VENDOR'S OPTION)." at -250.64,-83.902 h1.91
  text "ELECTRICAL TESTING" at -258.26,-88.982 h2.29
  text "22)" at -257.117,-93.936 h1.91
  text "ALL BOARDS SHALL BE ELECTRICALLY TESTED TO THE SUPPLIED IPC-D-356A NET LIST" at -250.64,-93.936 h1.91
  text "FOR CONTINUITY, OPENS AND SHORTS." at -250.64,-97.745 h1.91
  text "Layer Stack Up Detail for: 175-00060, rev1, PCB, NRES RTD_TEC Board.PcbDoc" at -237.622,-130.306 h2.01
  text "Layer" at -237.622,-138.479 h2.01
  text "COPPER THICKNESS" at -162.357,-140.614 h2.54
  text "Name" at -237.622,-142.492 h2.01
  text "Top Layer (*.GTL)" at -237.622,-149.197 h2.82
  text "1/2 oz,  1 oz Finished" at -166.319,-150.419 h2.54
  text "1 oz" at -167.104,-158.779 h2.54
  text "MidLayer1 (*.G1)" at -237.622,-159.232 h2.82
  text "1 oz" at -167.51,-169.015 h2.54
  text "InternalPlane1 (*.GP1)" at -237.622,-169.267 h2.82
  text "1 oz" at -167.942,-179.251 h2.54
  text "InternalPlane2 (*.GP2)" at -237.622,-179.303 h2.82
  text "InternalPlane3 (*.GP3)" at -237.622,-189.338 h2.82
  text "1 oz" at -168.348,-189.691 h2.54
  text "1 oz" at -169.821,-199.063 h2.54
  text "InternalPlane4 (*.GP4)" at -237.622,-199.374 h2.82
  text "Las Cumbres Observatory, Inc." at 209.912,-203.612 h2.29
  text "Las Cumbres Observatory" at 164.954,-206.66 h3.81
  text "PRIMARY PCB SPECIFICATIONS" at -67.786,-207.041 h5.08
  text "6740 Cortona Dr." at 221.088,-207.524 h2.29
  text "1/2 oz,  1 oz Finished" at -170.282,-208.229 h2.54
  text "Bottom Layer (*.GBL)" at -237.622,-209.409 h2.82
  text "Global Telescope Network" at 169.018,-210.724 h3.17
  text "Goleta, CA 93117" at 219.818,-211.334 h2.29
  text "(REFER TO COMPLETE SPEC LISTING AT LEFT FOR FURTHER DETAILS)" at -76.6,-212.248 h2.54
  text "www.lcogt.net" at 223.374,-215.042 h2.29
  text "DATE" at 160.509,-217.856 h0.81
  text "DESIGNED" at 184.385,-217.856 h0.81
  text "DRAWN" at 211.817,-217.856 h0.81
  text "SCALE" at 239.249,-217.856 h0.81
  text "NUMBER OF LAYERS" at -74.06,-218.598 h3.81
  text "7" at 16.11,-218.598 h3.81
  text "Rich Lobdill" at 219.564,-220.376 h1.4
  text "Rich Lobdill" at 190.989,-220.503 h1.4
  text "1 : 1" at 246.488,-220.859 h2.29
  text "09/26/2013" at 161.271,-221.036 h2.29
  text "FINISHED THICKNESS" at -74.06,-224.948 h3.81
  text ".062\"" at 11.665,-224.948 h3.81
  text "CHECKED/DATE" at 160.509,-225.222 h0.81
  text "APPROVED/DATE" at 211.817,-225.222 h0.81
  text "BASE MATERIAL" at -74.06,-231.298 h3.81
  text "FR4" at 9.76,-231.298 h3.81
  text "TITLE" at 160.509,-232.588 h0.81
  text "175-00060, NRES, RTD/TEC BOARD" at 166.097,-236.251 h2.54
  text "GOLD IMMERSION" at -2.787,-236.81 h3.81
  text "PLATING TYPE" at -74.06,-237.648 h3.81
  text "THIS DRAWING EMBODIES A PROPRIETARY DESIGN OWNED BY LAS CUMBRES" at -267.608,-238.258 h1.52
  text "OBSERVATORY.  IT IS SUBMITTED FOR A SPECIFIC PURPOSE UNDER A CON-" at -267.608,-240.798 h1.52
  text "SIZE" at 160.509,-240.97 h0.81
  text "DOC NO." at 172.193,-240.97 h0.81
  text "REV" at 225.025,-240.97 h0.81
  text "SHEET" at 236.709,-240.97 h0.81
  text "FIDENTIAL RELATIONSHIP, AND EXCEPT FOR PURPOSES EXPRESSLY GRANTED" at -267.608,-243.211 h1.52
  text "OF" at 247.631,-243.592 h1.52
  text "SOLDER MASK COLOR" at -74.06,-243.998 h3.81
  text "RED" at 12.935,-243.998 h3.81
  text "1" at 243.313,-244.1 h2.54
  text "X" at 253.473,-244.1 h2.54
  text "1" at 228.708,-244.43 h3.3
  text "-" at 186.29,-244.481 h3.3
  text "GPT" at 204.571,-244.856 h3.3
  text "C" at 163.938,-244.887 h2.54
  text "IN WRITING, ALL RIGHTS ARE RESERVED BY LAS CUMBRES OBSERVATORY." at -267.608,-245.497 h1.52
Mechanical 5:
  text "175-00060, rev 1" at 61.239,-23.317 h2.03
  text "PCB, NRES, RTD/TEC BOARD" at 61.493,-27.94 h2.03
  text "LAS CUMBRES OBSERVATORY     09/26/2012" at 61.399,-32.452 h2.03
Drill Drawing:
  lines w0.254: -270.402,-247.427 262.998,-247.427 262.998,158.973 -270.402,158.973 -270.402,-247.427 ; 160.001,-244.735 ccw(c161.271,-244.735) 161.271,-246.005 169.653,-246.005 ccw(c169.653,-244.989) 170.669,-244.989 170.669,-240.671 ccw(c169.653,-240.671) 169.653,-239.655 160.001,-239.655 160.001,-244.735 ; 160.001,-237.369 ccw(c161.271,-237.369) 161.271,-238.639 260.331,-238.639 ccw(c260.331,-237.369) 261.601,-237.369 261.601,-232.543 ccw(c260.331,-232.543) 260.331,-231.273 160.001,-231.273 160.001,-237.369 ; 160.001,-229.241 ccw(c161.017,-229.241) 161.017,-230.257 197.085,-230.257 ccw(c197.085,-228.987) 198.355,-228.987 198.355,-225.177 ccw(c197.085,-225.177) 197.085,-223.907 160.001,-223.907 160.001,-229.241 ; 171.685,-244.989 ccw(c172.701,-244.989) 172.701,-246.005 222.485,-246.005 ccw(c222.485,-244.989) 223.501,-244.989 223.501,-240.671 ccw(c222.485,-240.671) 222.485,-239.655 171.685,-239.655 171.685,-244.989 ; 199.371,-228.987 ccw(c200.641,-228.987) 200.641,-230.257 236.455,-230.257 ccw(c236.455,-228.987) 237.725,-228.987 237.725,-225.177 ccw(c236.455,-225.177) 236.455,-223.907 199.371,-223.907 199.371,-228.987 ; 224.517,-244.735 ccw(c225.787,-244.735) 225.787,-246.005 234.169,-246.005 ccw(c234.169,-244.989) 235.185,-244.989 235.185,-240.671 ccw(c234.169,-240.671) 234.169,-239.655 224.517,-239.655 224.517,-244.735 ; 236.201,-244.989 ccw(c237.217,-244.989) 237.217,-246.005 260.331,-246.005 ccw(c260.331,-244.735) 261.601,-244.735 261.601,-240.925 ccw(c260.331,-240.925) 260.331,-239.655 236.201,-239.655 236.201,-244.989 ; 238.741,-228.987 ccw(c240.011,-228.987) 240.011,-230.257 260.331,-230.257 ccw(c260.331,-228.987) 261.601,-228.987 261.601,-225.177 ccw(c260.331,-225.177) 260.331,-223.907 238.741,-223.907 238.741,-228.987
  lines w0.508: -269.765,-231.403 cw(c-268.497,-233.305) -268.497,-231.019 ; -268.497,-232.035 ccw(c-268.497,-233.305) -269.767,-233.305 -269.767,-245.751 ccw(c-268.497,-245.751) -268.497,-247.021 -187.217,-247.021 ccw(c-187.217,-245.751) -185.947,-245.751 -185.947,-237.115 ccw(c-187.217,-237.115) -187.217,-235.845 -254.273,-235.845 ; -185.315,-247.019 ccw(c-187.217,-245.751) -184.931,-245.751 -184.931,-237.115 ; 158.856,-246.987 cw(c161.271,-244.735) 157.969,-244.735 157.969,-223.907 cw(c160.001,-223.907) 160.001,-221.875 260.331,-221.875 cw(c260.331,-225.177) 262.583,-222.762 ; 158.985,-244.735 ccw(c161.271,-244.735) 161.271,-247.021 260.331,-247.021 ccw(c260.331,-244.735) 262.617,-244.735 262.617,-225.177 ccw(c260.331,-225.177) 260.331,-222.891 160.001,-222.891 ccw(c160.001,-223.907) 158.985,-223.907 158.985,-244.735
  lines w0.762: -283.102,-260.127 275.698,-260.127 275.698,171.673 -283.102,171.673 -283.102,-260.127
  text ".Legend" at -4.362,-142.855 h2.54
  text "DESIGNED" at 160.509,-225.222 h0.81
  text "DRAWN" at 199.879,-225.222 h0.81
  text "SCALE" at 239.249,-225.222 h0.81
  text "Rich Lobdill" at 172.854,-227.666 h1.4
  text "Rich Lobdill" at 212.503,-227.717 h1.4
  text "1 : 1" at 246.488,-228.225 h2.29
  text "TITLE" at 160.509,-232.588 h0.81
  text "175-00060, NRES, RTD/TEC BOARD" at 166.021,-236.251 h2.54
  text "THIS DRAWING EMBODIES A PROPRIETARY DESIGN OWNED BY LAS CUMBRES" at -267.481,-238.639 h1.52
  text "SIZE" at 160.509,-240.97 h0.81
  text "DOC NO." at 172.193,-240.97 h0.81
  text "REV" at 225.025,-240.97 h0.81
  text "SHEET" at 236.709,-240.97 h0.81
  text "OBSERVATORY.  IT IS SUBMITTED FOR A SPECIFIC PURPOSE UNDER A CON-" at -267.481,-241.179 h1.52
  text "FIDENTIAL RELATIONSHIP, AND EXCEPT FOR PURPOSES EXPRESSLY GRANTED" at -267.481,-243.592 h1.52
  text "OF" at 247.631,-243.592 h1.52
  text "2" at 242.932,-244.1 h2.54
  text "X" at 253.473,-244.1 h2.54
  text "-" at 186.29,-244.481 h3.3
  text "1" at 228.581,-244.481 h3.3
  text "C" at 163.938,-244.887 h3.05
  text "GD1" at 207.118,-244.887 h3.05
  text "IN WRITING, ALL RIGHTS ARE RESERVED BY LAS CUMBRES OBSERVATORY." at -267.481,-245.878 h1.52

## Dimensions
-11,54 to -29,76 on Mechanical 2
-9.303,69.929 to -0.54,84.929 on Mechanical 2
179,0 to 179,85 on Mechanical 2
-9.303,69.929 to 179,85 on Mechanical 2

## Text inside footprints (layer, text, board x,y; h text height)
P1: Top Overlay "10" at 7.798,69.367 h1.27 r270; Top Overlay "9" at 4.877,68.885 h1.27 r270; Top Overlay "1" at 5.258,83.083 h1.27 r270; Top Overlay "2" at 7.798,83.591 h1.27 r270